# Allegro board DA CONVERTOR.brd
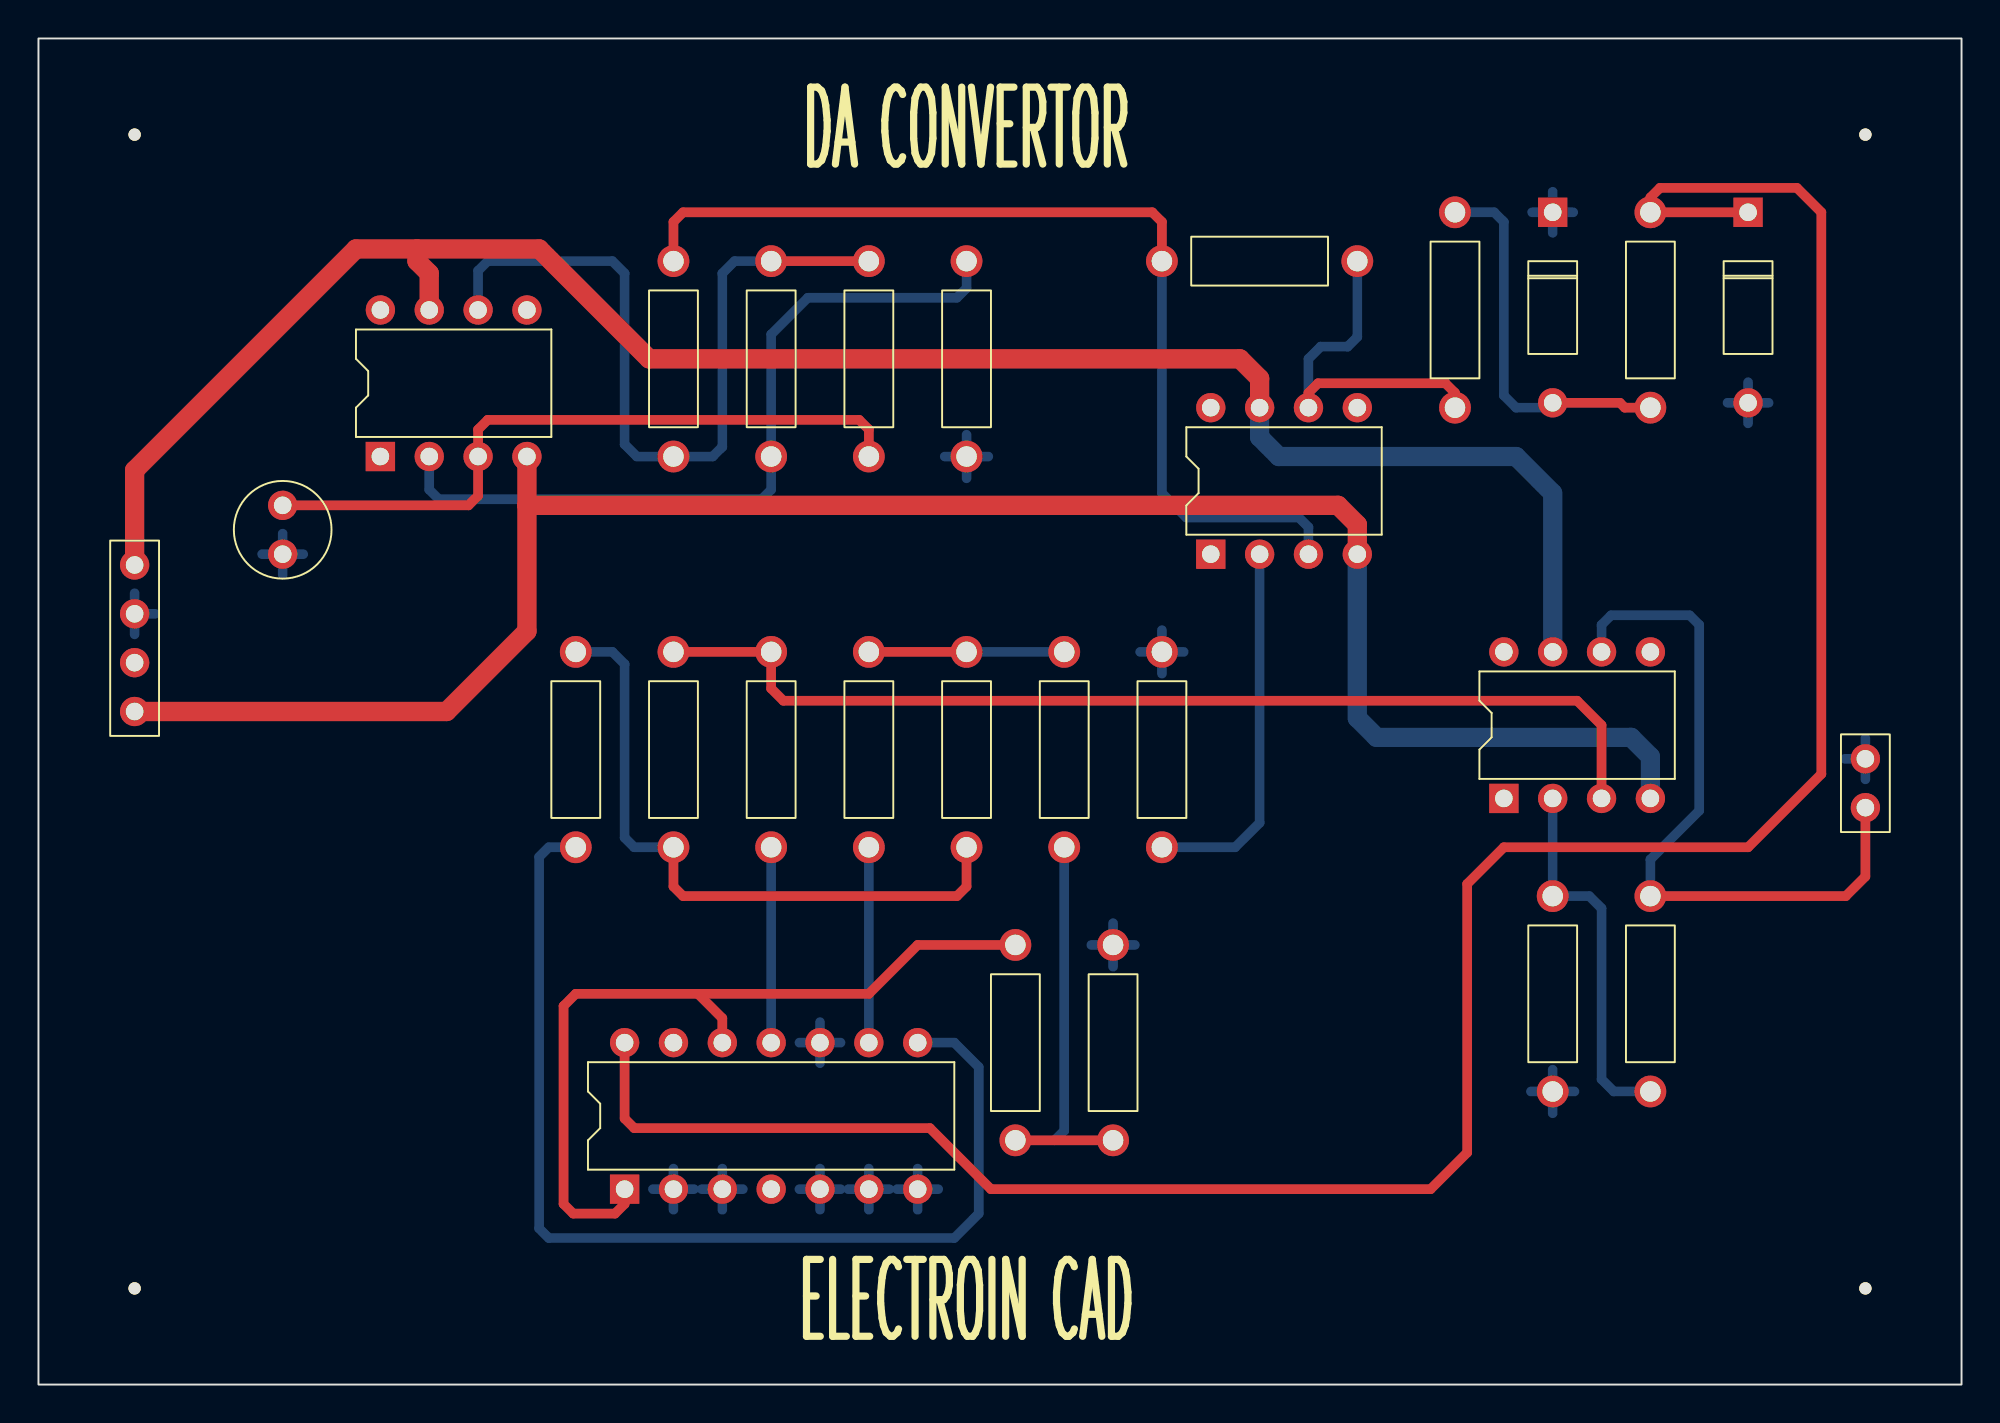
[diagram p0: board, top side]
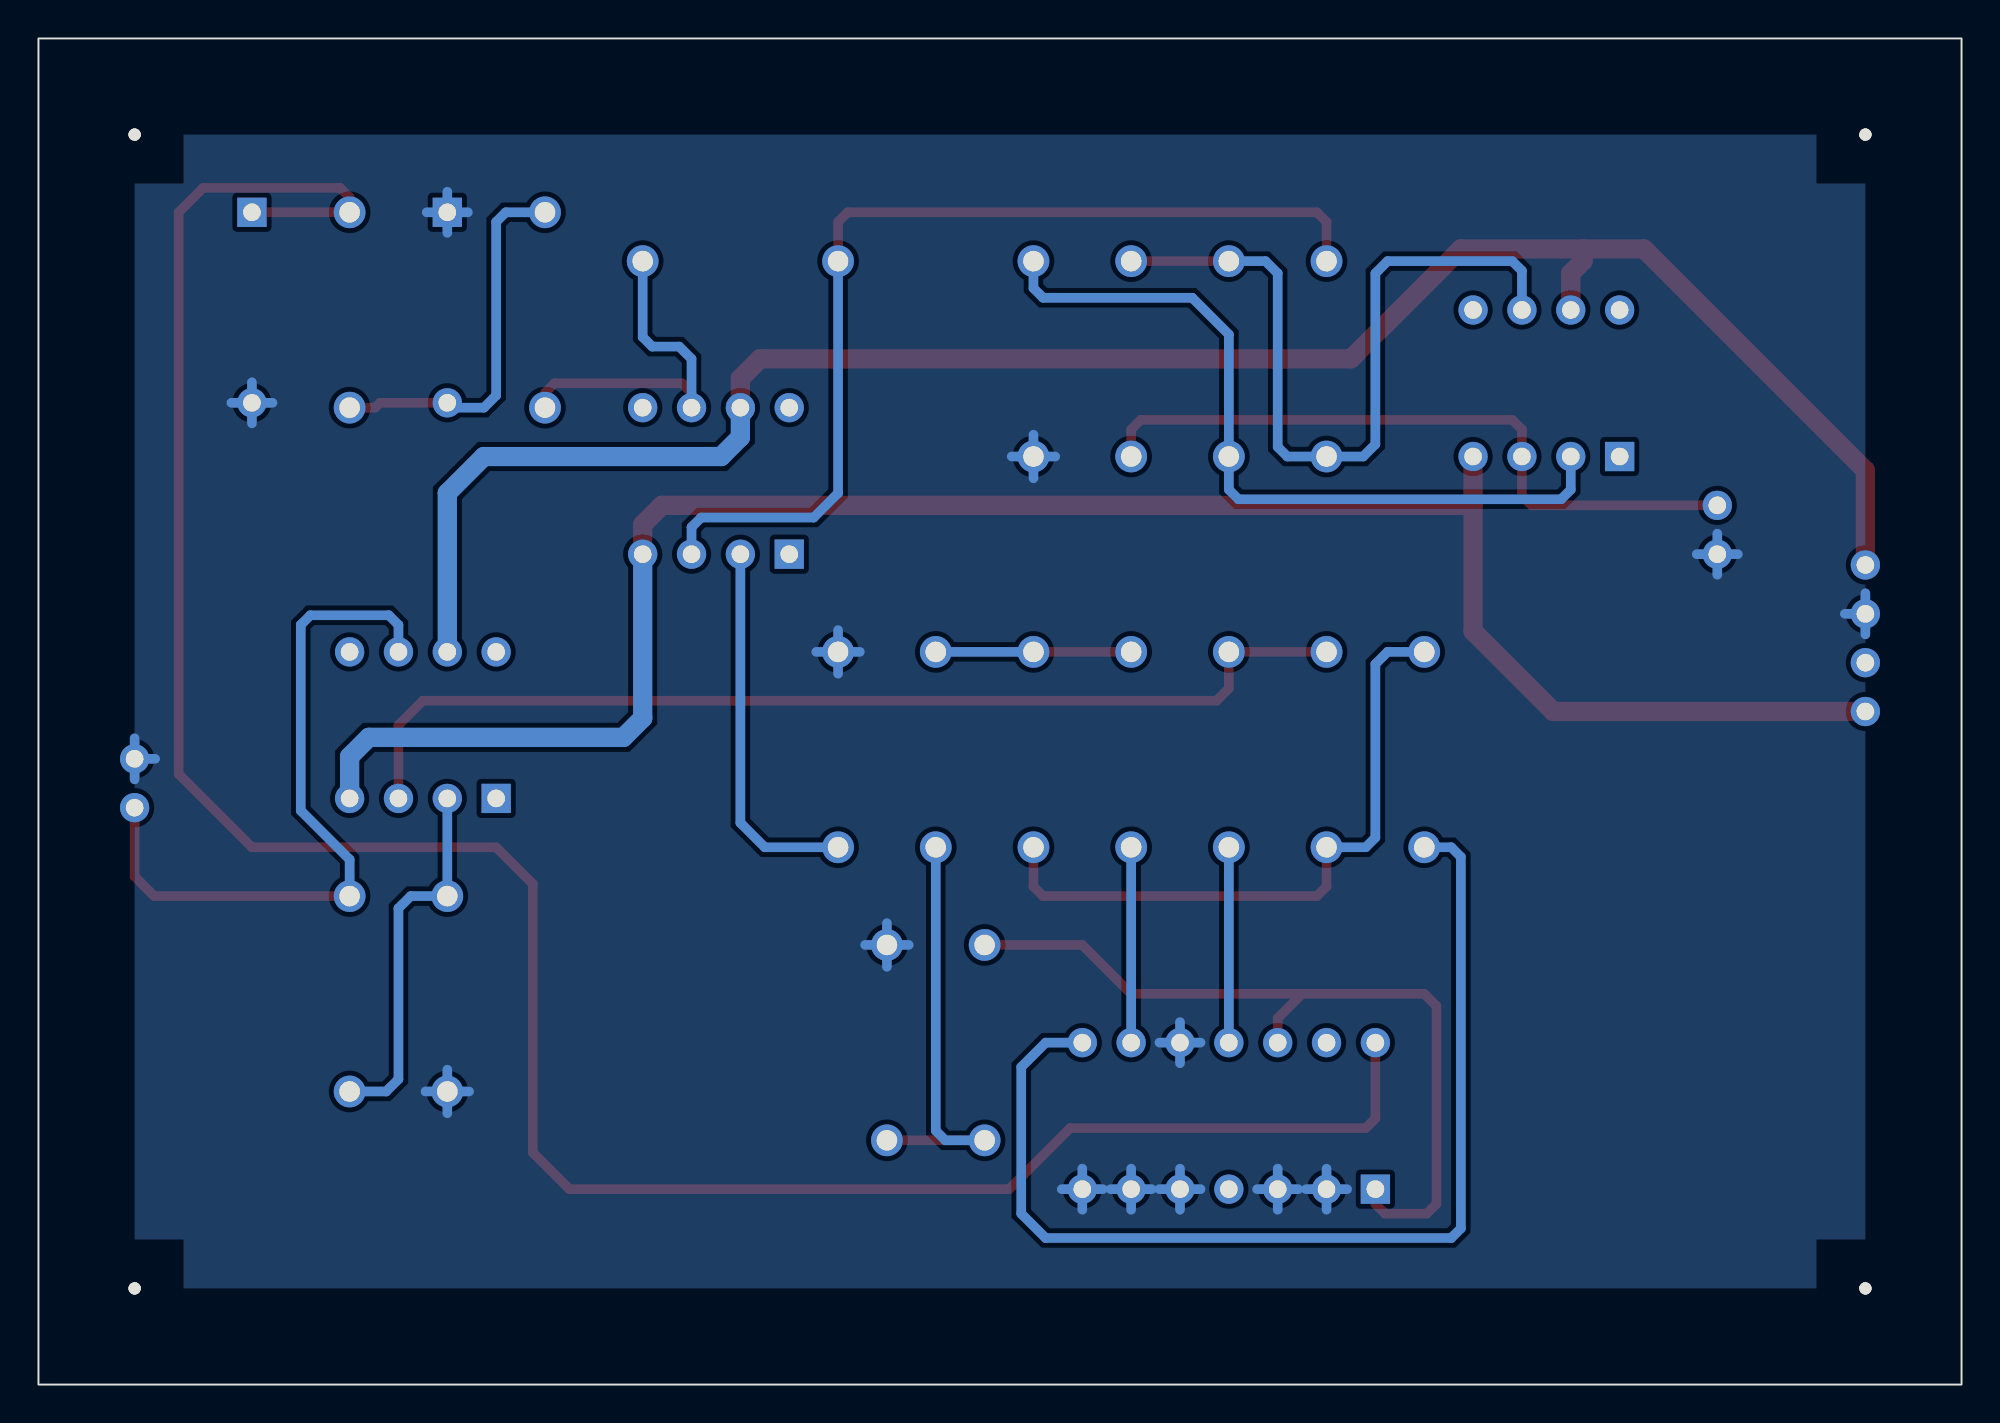
[diagram p1: board, bottom side, seen from below]

Outline 100 x 70 mm; copper layers: TOP, BOTTOM. Coordinates in mm from the lower left corner of the outline.
Outline path: rectangle 0,0 100,70

## Design rules (mm)
constraint set DEFAULT: min track width 0.5
nets with their own width: min track width 1; nets +5V +12V -12V

## Placement (name value [footprint] x y rotation side)
C1  0.1uF  [CAP196]  12.7 45.72 180 top
D1  D1N4148  [DO41]  78.74 60.96 180 top
D2  RD 5.6A  [DO41]  88.9 60.96 180 top
J1  CON2  [JUMPER2]  95 30 90 top
J2  CON4  [JUMPER4]  5 35 90 top
NOREF  -  [unnamed]  95 5 0 top
NOREF#2  -  [unnamed]  95 65 0 top
NOREF#3  -  [unnamed]  5 5 0 top
NOREF#4  -  [#2]  100 0 90 top
NOREF#5  -  [unnamed]  5 65 0 top
NOREF#6  -  [#2]  0 70 0 top
R1  10K  [RES400]  43.18 48.26 0 top
R2  5.1K  [RES400]  58.42 58.42 270 top
R3  10K  [RES400]  33.02 58.42 180 top
R4  1K  [RES400]  73.66 50.8 0 top
R5  1K  [RES400]  83.82 50.8 0 top
R6  10K  [RES400]  58.42 27.94 0 top
R7  6.8K  [RES400]  38.1 58.42 180 top
R8  1K  [RES400]  48.26 58.42 180 top
R9  22K  [RES400]  38.1 27.94 0 top
R10  22K  [RES400]  83.82 25.4 180 top
R11  10K  [RES400]  33.02 27.94 0 top
R12  22K  [RES400]  27.94 27.94 0 top
R13  10K  [RES400]  48.26 38.1 180 top
R14  22K  [RES400]  43.18 27.94 0 top
R15  10K  [RES400]  53.34 27.94 0 top
R16  10K  [RES400]  78.74 15.24 0 top
R17  22K  [RES400]  50.8 22.86 180 top
R18  10K  [RES400]  55.88 22.86 180 top
U1  LM741  [DIP8_3]  17.78 48.26 90 top
U2  LM741  [DIP8_3]  60.96 43.18 90 top
U3  74LS90  [DIP14_3]  30.48 10.16 90 top
U4  LM741  [DIP8_3]  76.2 30.48 90 top

## Library data of the parts
C1 = CAP NP: Tolerance: ***; User Part Number: ***
D1 = D1N4148
D2 = DIODE ZENER
J1 = CON2: User Part Number: ***
J2 = CON4: User Part Number: ***
R1-R18 = R: Tolerance: ***; User Part Number: ***
U1 U2 U4 = LM741_0: Tolerance: ***; User Part Number: ***
U3 = 74LS90_1: Tolerance: ***; User Part Number: ***

## Footprints (pads in the part's own frame, mm; a bottom-side part is the same pattern mirrored in y, then rotated)
CAP196
  round 1.524 hole 0.914: 1(0,0) 2(0,2.54)
DIP8_3
  rect 1.524x1.524 hole 0.914: 1(0,0)
  round 1.524 hole 0.914: 2(0,-2.54) 3(0,-5.08) 4(0,-7.62) 5(7.62,-7.62) 6(7.62,-5.08) 7(7.62,-2.54) 8(7.62,0)
DIP14_3
  rect 1.524x1.524 hole 0.914: 1(0,0)
  round 1.524 hole 0.914: 2(0,-2.54) 3(0,-5.08) 4(0,-7.62) 5(0,-10.16) 6(0,-12.7) 7(0,-15.24) 8(7.62,-15.24) 9(7.62,-12.7) 10(7.62,-10.16) 11(7.62,-7.62) 12(7.62,-5.08) 13(7.62,-2.54) 14(7.62,0)
DO41
  rect 1.524x1.524 hole 0.914: 1(0,0)
  round 1.524 hole 0.914: 2(0,9.906)
JUMPER2
  round 1.524 hole 0.914: 1(0,0) 2(2.54,0)
JUMPER4
  round 1.524 hole 0.914: 1(0,0) 2(2.54,0) 3(5.08,0) 4(7.62,0)
RES400
  round 1.651 hole 1.067: 1(0,0) 2(0,10.16)
unnamed
  round 0.635 hole 3.175 unplated: (0,0)

## Nets
+5V: J2.2
+12V: J2.1 U1.4(V-) U2.4(V-) U4.4(V-)
-12V: J2.4 U1.7 U2.7 U4.7
GND: C1.2 D1.1 D2.2 J1.2 J2.3 R6.2 R8.2 R16.1 R18.1 U3.2 U3.3 U3.5(VCC) U3.6 U3.7 U3.10
CLK: D2.1(CATHODE) R5.2 U3.14
SIG: R9.2 R11.2 U4.3
N00333: R7.2 R8.1 U1.2
N00351: C1.1 R1.1 U1.3
N00406: R1.2 R3.2 R7.1 U1.6
N00532: R2.1 R3.1 U2.3
N00536: R6.1 U2.2
N00560: R2.2 R4.1 U2.6
N01137: D1.2 R4.2 R5.1
N01378: R17.1 U3.1 U3.12
N01441: R9.1 U3.11
N01716: R14.1 U3.9
N01730: R12.1 U3.8
N01850: R11.1 R12.2 R13.2
N01864: R13.1 R14.2 R15.2
N01878: R15.1 R17.2 R18.2
N01921: R10.2 R16.2 U4.2
N01955: J1.1 R10.1 U4.6

Pads without a net: U1 1 5 8; U2 1 5 8; U3 4 13; U4 1 5 8

## Routing (per net, layer and track width the routed paths; a pad name or vN(x,y) marks a point on that pad's centre or on a via; arc(x,y) is an arc through that point)
+12V: length 103.1
  TOP w1: 25.4,45.72 25.4,39.17 21.23,35 J2.1 ; 25.4,45.72 67.58,45.72 68.58,44.72 U2.4 ; 25.4,45.72 U1.4
  BOTTOM w1: U2.4 68.58,34.66 69.58,33.66 82.82,33.66 83.82,32.66 U4.4
-12V: length 102.2
  TOP w1: J2.4 5,47.54 16.51,59.05 19.68,59.05 ; 19.68,59.05 19.68,58.42 20.32,57.78 U1.7 ; 19.68,59.05 26.04,59.05 31.75,53.34 62.48,53.34 63.5,52.32 U2.7
  BOTTOM w1: U4.7 78.74,46.36 76.84,48.26 64.5,48.26 63.5,49.26 U2.7
GND: length 63
  BOTTOM w0.5: D2.2 89.97,51.05 ; D2.2 88.9,49.98 ; D2.2 87.83,51.05 ; D2.2 88.9,52.12 ; 39.57,10.16 U3.5 ; U3.5 40.64,9.09 ; U3.5 40.64,11.23 ; U3.5 41.71,10.16 ; R6.2 59.55,38.1 ; R6.2 58.42,39.23 ; R6.2 58.42,36.97 ; R6.2 57.29,38.1 ; 42.11,10.16 U3.6 ; U3.6 43.18,9.09 ; U3.6 43.18,11.23 ; U3.6 44.25,10.16 ; 31.95,10.16 U3.2 ; U3.2 34.09,10.16 ; U3.2 33.02,11.23 ; U3.2 33.02,9.09 ; 78.74,14.11 R16.1 ; R16.1 79.87,15.24 ; R16.1 77.61,15.24 ; R16.1 78.74,16.37 ; 54.75,22.86 R18.1 ; R18.1 57.01,22.86 ; R18.1 55.88,23.99 ; R18.1 55.88,21.73 ; 48.26,47.13 R8.2 ; R8.2 49.39,48.26 ; R8.2 48.26,49.39 ; R8.2 47.13,48.26 ; 95,31.47 J1.2 ; J1.2 93.93,32.54 ; J1.2 95,33.61 ; U3.7 46.79,10.16 ; U3.7 44.65,10.16 ; U3.7 45.72,11.23 ; U3.7 45.72,9.09 ; 78.74,59.89 D1.1 ; D1.1 77.67,60.96 ; D1.1 78.74,62.03 ; D1.1 79.81,60.96 ; 35.56,9.09 U3.3 ; U3.3 34.49,10.16 ; U3.3 35.56,11.23 ; U3.3 36.63,10.16 ; J2.3 5,41.15 ; J2.3 6.07,40.08 ; J2.3 5,39.01 ; 11.63,43.18 C1.2 ; C1.2 12.7,42.11 ; C1.2 12.7,44.25 ; C1.2 13.77,43.18 ; 39.57,17.78 U3.10 ; U3.10 40.64,16.71 ; U3.10 41.71,17.78 ; U3.10 40.64,18.85
CLK: length 129.5
  TOP w0.5: D2.1 R5.2 83.82,61.73 84.32,62.23 91.44,62.23 92.71,60.96 92.71,31.75 88.9,27.94 76.2,27.94 74.3,26.04 74.3,12.06 72.39,10.16 49.53,10.16 46.35,13.34 30.98,13.34 30.48,13.84 U3.14
SIG: length 54.8
  TOP w0.5: R11.2 R9.2 38.1,36.2 38.73,35.56 80.01,35.56 81.28,34.29 U4.3
N00333: length 40.6
  BOTTOM w0.5: R8.1 48.26,57.02 47.76,56.52 40.01,56.52 38.1,54.61 R7.2 38.1,46.54 37.6,46.04 20.82,46.04 20.32,46.54 U1.2
N00351: length 36
  TOP w0.5: R1.1 43.18,49.66 42.68,50.16 23.36,50.16 22.86,49.66 U1.3 22.86,46.22 22.36,45.72 C1.1
N00406: length 41.5
  TOP w0.5: R7.1 R1.2
  BOTTOM w0.5: R7.1 36.2,58.42 35.56,57.78 35.56,48.76 35.06,48.26 R3.2 31.11,48.26 30.48,48.9 30.48,57.78 29.84,58.42 23.36,58.42 22.86,57.92 U1.6
N00532: length 51.7
  TOP w0.5: R2.1 58.42,60.46 57.92,60.96 33.52,60.96 33.02,60.46 R3.1
  BOTTOM w0.5: U2.3 66.04,44.59 65.54,45.09 59.69,45.09 58.42,46.35 R2.1
N00536: length 19.6
  BOTTOM w0.5: U2.2 63.5,29.21 62.23,27.94 R6.1
N00560: length 19.1
  TOP w0.5: R4.1 73.66,51.57 73.16,52.07 66.54,52.07 66.04,51.57 U2.6
  BOTTOM w0.5: R2.2 68.58,54.48 68.08,53.98 66.67,53.98 66.04,53.34 U2.6
N01137: length 19.9
  TOP w0.5: R5.1 82.49,50.8 82.24,51.05 D1.2
  BOTTOM w0.5: R4.2 75.7,60.96 76.2,60.46 76.2,51.44 76.83,50.8 78.49,50.8 D1.2
N01378: length 42.5
  TOP w0.5: 34.29,20.32 43.18,20.32 45.72,22.86 R17.1 ; 34.29,20.32 27.94,20.32 27.3,19.68 27.3,9.39 27.8,8.89 29.98,8.89 30.48,9.39 U3.1 ; 34.29,20.32 35.56,19.05 U3.12
N01441: length 10.2
  BOTTOM w0.5: U3.11 R9.1
N01716: length 10.2
  BOTTOM w0.5: U3.9 R14.1
N01730: length 56.3
  BOTTOM w0.5: U3.8 47.62,17.78 48.9,16.51 48.9,8.89 47.62,7.62 26.54,7.62 26.04,8.12 26.04,27.44 26.54,27.94 R12.1
N01850: length 34.3
  TOP w0.5: R11.1 33.02,25.9 33.52,25.4 47.76,25.4 48.26,25.9 R13.2
  BOTTOM w0.5: R11.1 30.98,27.94 30.48,28.44 30.48,37.47 29.84,38.1 R12.2
N01864: length 10.2
  TOP w0.5: R14.2 R13.1
  BOTTOM w0.5: R13.1 R15.2
N01878: length 22.6
  TOP w0.5: R17.2 R18.2
  BOTTOM w0.5: R17.2 52.84,12.7 53.34,13.2 R15.1
N01921: length 19.6
  BOTTOM w0.5: R10.2 81.92,15.24 81.28,15.88 81.28,24.77 80.64,25.4 R16.2 U4.2
N01955: length 37.2
  TOP w0.5: J1.1 95,26.42 93.98,25.4 R10.1
  BOTTOM w0.5: R10.1 83.82,27.3 86.36,29.84 86.36,39.51 85.86,40.01 81.78,40.01 81.28,39.51 U4.6

## Copper pours and planes (outline as drawn; the poured copper is in the pictures)
GND on BOTTOM: 95,5 95,65 5,65 5,5

## Text on the board
Ref Des/Silkscreen Top: DA CONVERTOR | ELECTROIN CAD
DIMENSION: FIGURE | FINISHED_SIZE | 0.914 | 1.067 | 3.175 | DRILL CHART: TOP to BOTTOM | ALL UNITS ARE IN MILLIMETERS | PLATED | NON-PLATED | QTY | 50 | 36 | 4
